# Altium PCB PCB.PcbDoc
Units mil, origin at the board's own origin, x right, y up, seen from the top; angles counter-clockwise.
Board outline 3750 x 2500 mil, 2 copper layers (Top Layer, Bottom Layer); 12 components, 0 nets, 243 pads, 2 vias.
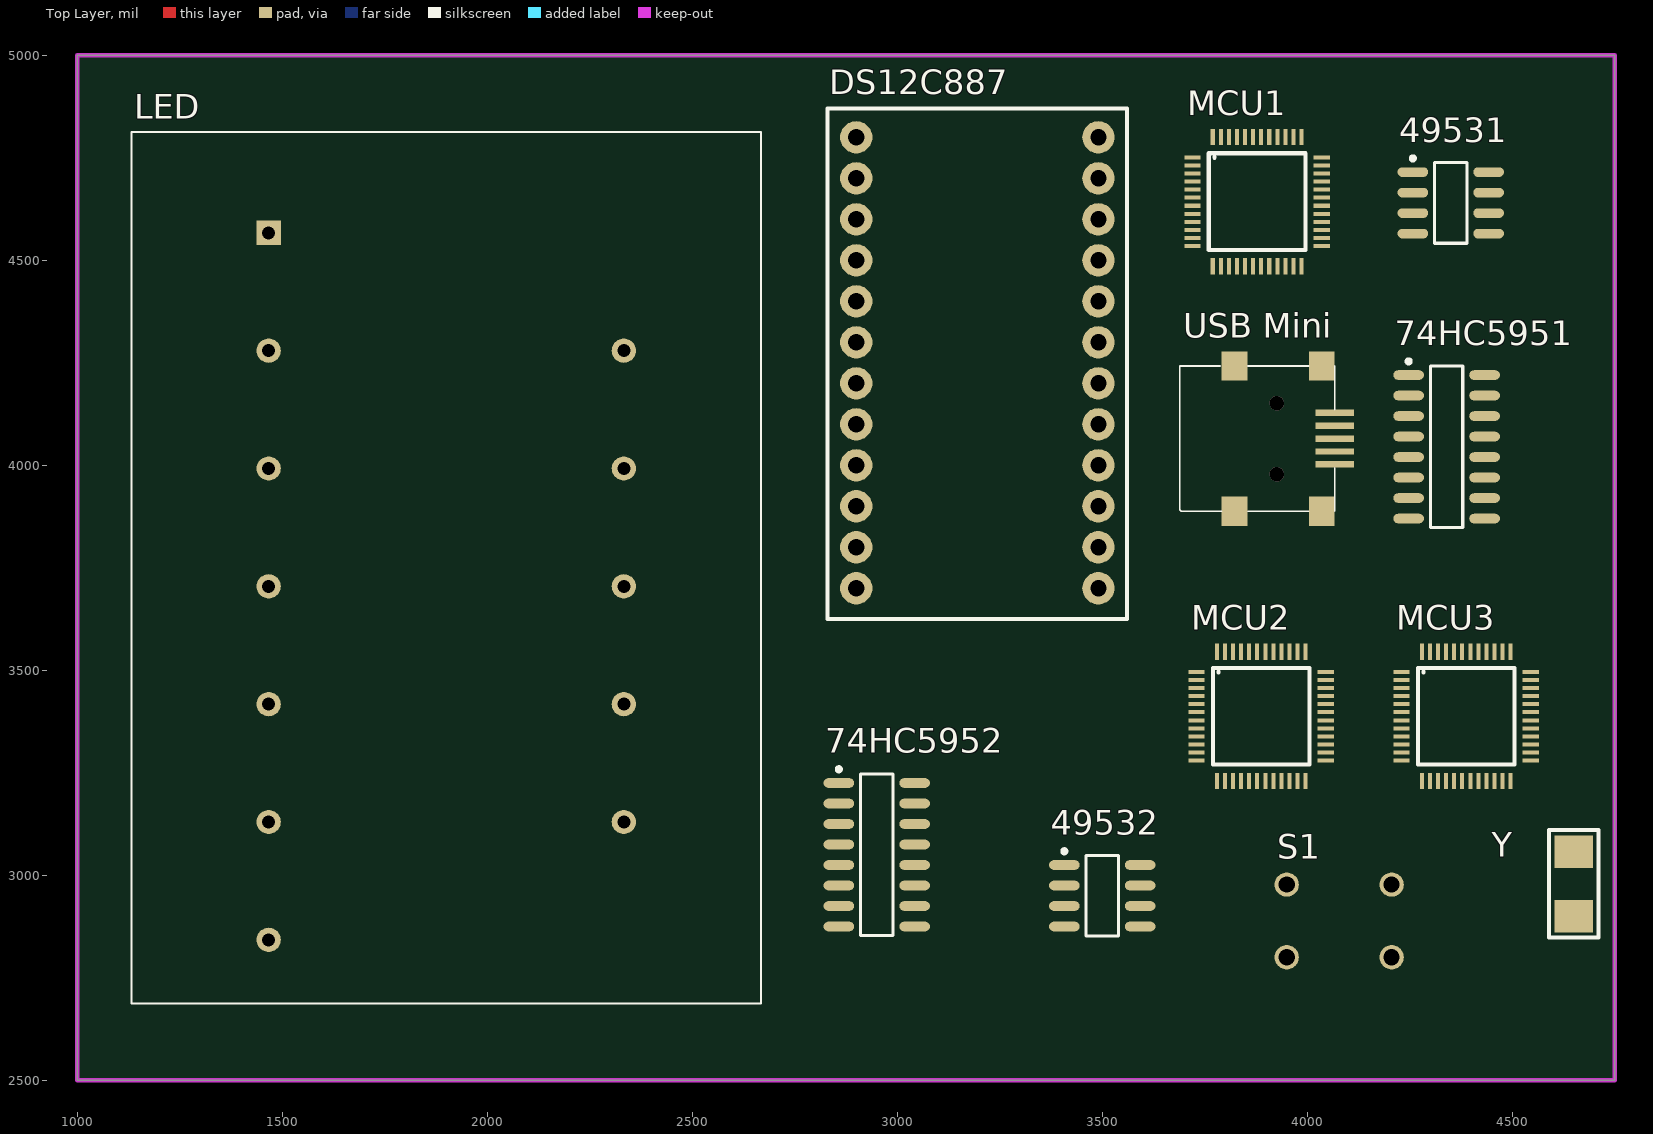
[diagram p0: Top Layer view]
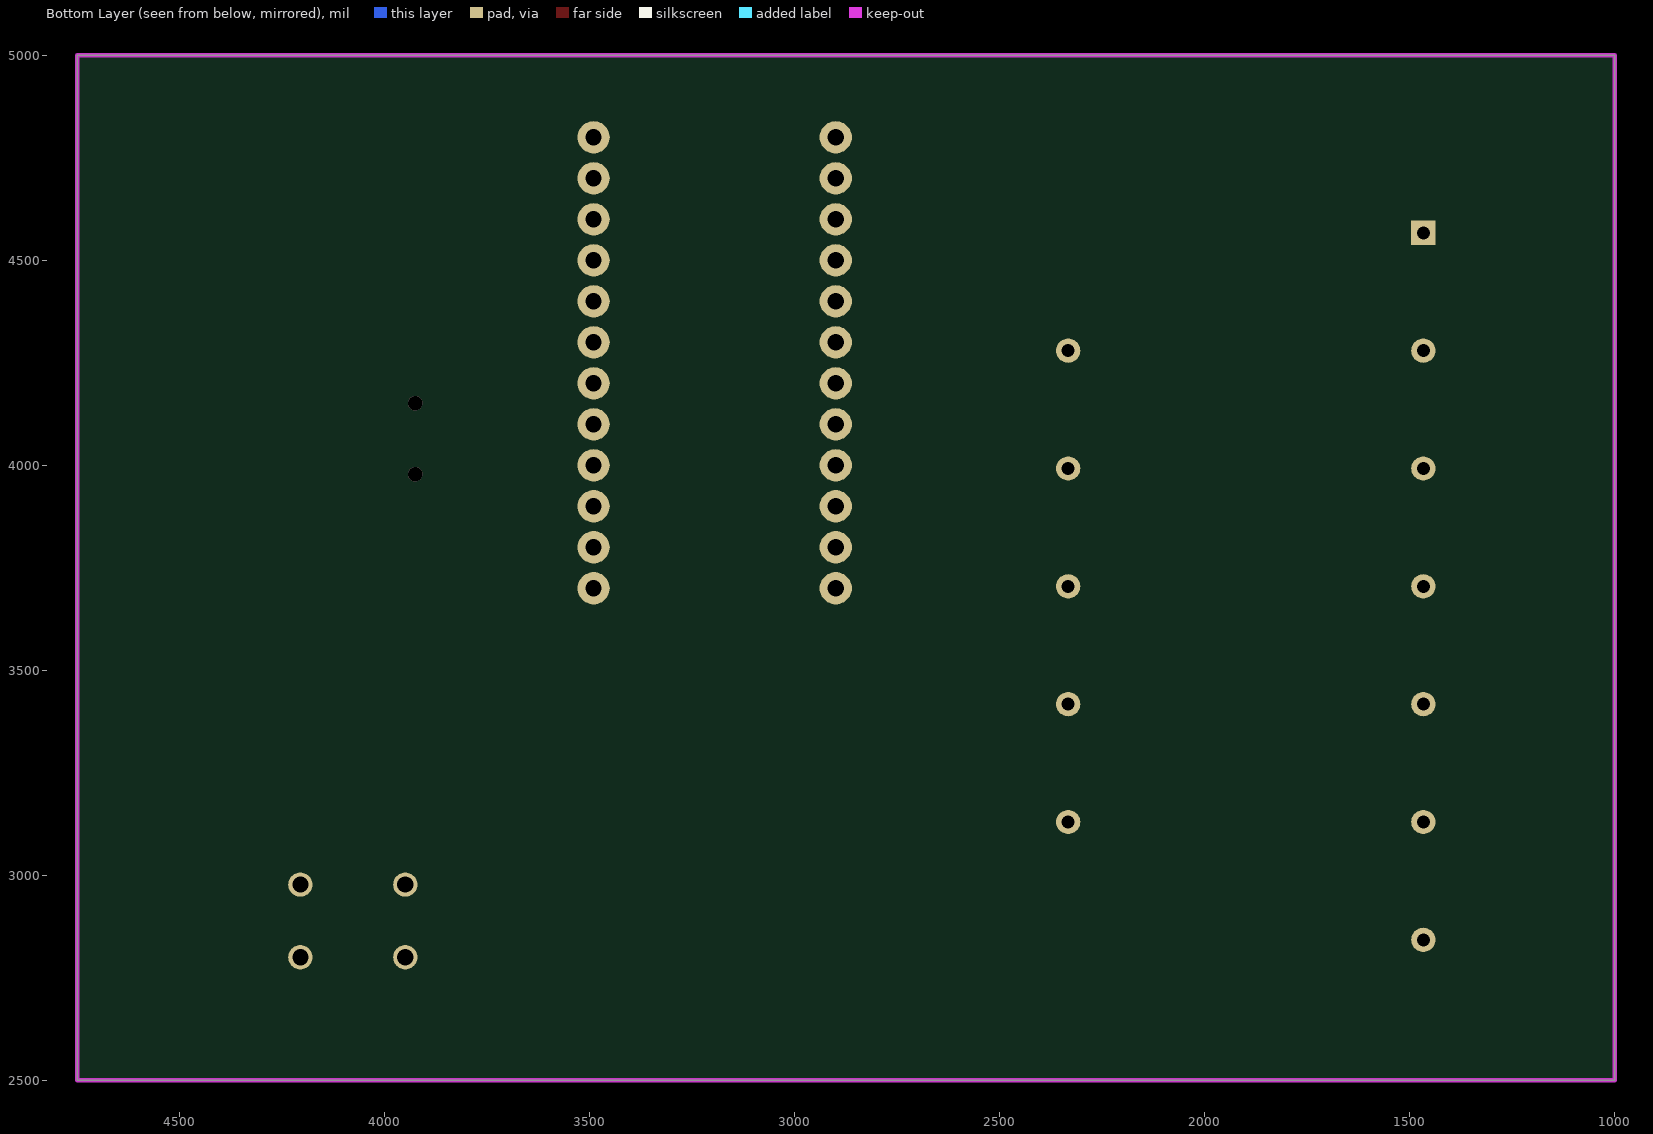
[diagram p1: Bottom Layer view, seen from below]

## Layer stack, top to bottom
Top Layer: signal copper 1.4
Dielectric: dielectric 12.6, FR-4, Dk 4.8
Bottom Layer: signal copper 1.4

## Board outline
1000,5000 1000,2500 4750,2500 4750,5000

## Design rules (kind name [scope] priority, off if disabled: settings)
Clearance [All] p1: gap=10
MinimumSolderMaskSliver [All] p1 off: minsoldermaskwidth=10
PolygonConnect [All] p1: connectstyle=Relief reliefconductorwidth=10 reliefentries=4 polygonreliefangle="90 Angle" airgapwidth=10
RoutingVias [All] p1: holewidth=28 width=50 viastyle="Through Hole" minholewidth=28 minwidth=50 maxholewidth=28 maxwidth=50
SilkscreenOverComponentPads [All] p1 off: minsilkscreentomaskgap=10
SolderMaskExpansion [All] p1: expansion=4
Width [All] p1: maxlimit=10 minlimit=10 preferedwidth=10
26 further rules are at their usual default settings.

## Components (designator, comment, footprint, x,y, rotation, side; value= is the part's Value field where it differs from the comment)
74HC5951 "74HC595" SO-16_L 4340,4045 r0 top
74HC5952 "74HC595" SO-16_L 2950,3050 r0 top
49531 "4953" SO8_L 4350,4640 r0 top
49532 "4953" SO8_L 3500,2950 r0 top
DS12C887 "DS12C887" TIMER 2900,4800 r0 top
LED "LED Matrix" "LED-MATRIX 5*7" 1900,3750 r0 top
MCU1 "STC12C5A60S2-35I-LQFP48" MCU 3740,4505 r0 top
MCU2 "STC12C5A60S2-35I-LQFP48" MCU 3750,3250 r0 top
MCU3 "STC12C5A60S2-35I-LQFP48" MCU 4250,3250 r0 top
S1 "SW-PB" BUTTON 3950,2800 r0 top
"USB Mini" "USB" USBFOOT 3945,4065 r0 top
Y "XTAL" 5023 4650,2900 r90 top

## Footprints (in the part's own frame and the unit in brackets; to place one, negate y for a bottom-side part, rotate by r counter-clockwise, add the part's x,y. Pads: shape width x height; smd on the part's side, far side on the other; paste and mask are expansions set on the pad)
5023 [mm]
  rect 2x2.4 smd: 1(0,0) 2(4,0)
  silkscreen extent -1.32,-1.52 5.33,1.52
BUTTON [mm]
  round 1.5 hole 1: 0(0,0) 1(6.5,0) 2(6.5,4.5) 3(0,4.5)
"LED-MATRIX 5*7" [mm] "LED"
  rect 1.5x1.5 hole 0.8: 1(-11,20.75)
  round 1.5 hole 0.8: 2(-11,13.45) 3(-11,6.15) 4(-11,-1.15) 5(-11,-8.45) 6(-11,-15.75) 7(-11,-23.05) 8(11,13.45) 9(11,6.15) 10(11,-1.15) 11(11,-8.45) 12(11,-15.75)
  silkscreen extent -19.5,-27 19.5,27, body extent -19.5,-27 19.5,27, height 10
MCU [mm]
  rect 1x0.25 smd: 1(-0.5,6.25) 2(-0.5,5.75) 3(-0.5,5.25) 4(-0.5,4.75) 5(-0.5,4.25) 6(-0.5,3.75) 7(-0.5,3.25) 8(-0.5,2.75) 9(-0.5,2.25) 10(-0.5,1.75) 11(-0.5,1.25) 12(-0.5,0.75) 25(7.5,0.75) 26(7.5,1.25) 27(7.5,1.75) 28(7.5,2.25) 29(7.5,2.75) 30(7.5,3.25) 31(7.5,3.75) 32(7.5,4.25) 33(7.5,4.75) 34(7.5,5.25) 35(7.5,5.75) 36(7.5,6.25)
  rect 0.25x1 smd: 13(0.75,-0.5) 14(1.25,-0.5) 15(1.75,-0.5) 16(2.25,-0.5) 17(2.75,-0.5) 18(3.25,-0.5) 19(3.75,-0.5) 20(4.25,-0.5) 21(4.75,-0.5) 22(5.25,-0.5) 23(5.75,-0.5) 24(6.25,-0.5) 37(6.25,7.5) 38(5.75,7.5) 39(5.25,7.5) 40(4.75,7.5) 41(4.25,7.5) 42(3.75,7.5) 43(3.25,7.5) 44(2.75,7.5) 45(2.25,7.5) 46(1.75,7.5) 47(1.25,7.5) 48(0.75,7.5)
  silkscreen extent 0.5,0.5 6.5,6.5
SO8_L [mm] "SOIC, 8-Leads, Body 4.9x3.9mm, Pitch 1.27mm, IPC High Density"
  oval 1.9x0.6 smd: 1(-2.35,1.905) 2(-2.35,0.635) 3(-2.35,-0.635) 4(-2.35,-1.905) 5(2.35,-1.905) 6(2.35,-0.635) 7(2.35,0.635) 8(2.35,1.905)
  silkscreen extent -2.47,-2.5 1,2.88, body extent -2,-2.5 2,2.5, height 1.75
SO-16_L [mm] "SOIC, 16-Leads, Body 9.9x3.9mm, Pitch 1.27mm, IPC High Density"
  oval 1.9x0.6 smd: 1(-2.35,4.445) 2(-2.35,3.175) 3(-2.35,1.905) 4(-2.35,0.635) 5(-2.35,-0.635) 6(-2.35,-1.905) 7(-2.35,-3.175) 8(-2.35,-4.445) 9(2.35,-4.445) 10(2.35,-3.175) 11(2.35,-1.905) 12(2.35,-0.635) 13(2.35,0.635) 14(2.35,1.905) 15(2.35,3.175) 16(2.35,4.445)
  silkscreen extent -2.47,-5 1,5.42, body extent -2,-5 2,5, height 1.75
TIMER [mm]
  round 2 hole 1: 1(0,0) 2(0,-2.54) 3(0,-5.08) 4(0,-7.62) 5(0,-10.16) 6(0,-12.7) 7(0,-15.24) 8(0,-17.78) 9(0,-20.32) 10(0,-22.86) 11(0,-25.4) 12(0,-27.94) 13(15,-27.94) 14(15,-25.4) 15(15,-22.86) 16(15,-20.32) 17(15,-17.78) 18(15,-15.24) 19(15,-12.7) 20(15,-10.16) 21(15,-7.62) 22(15,-5.08) 23(15,-2.54) 24(15,0)
  silkscreen extent -1.78,-29.84 16.76,1.78
USBFOOT [mm]
  rect 2.4x0.4 smd: 1(3.1,1.6) 2(3.1,0.8) 3(3.1,0) 4(3.1,-0.8) 5(3.1,-1.6)
  rect 1.6x1.8 smd: 6(2.3,-4.5) 7(2.3,4.5) 8(-3.1,4.5) 9(-3.1,-4.5)
  silkscreen extent -6.5,-4.5 3.1,4.5

## Part data
LED: library part "LED-Matrix 5*7"
S1: "Switch"
Y: "Crystal Oscillator"

## Via types
v1: diameter 35.43, hole 35.43, Top Layer to Bottom Layer, 2 vias

## Nets (pads, with @x,y where several pads share a name; then routed paths per layer and width w, separated by ;. In a path a pad name is that pad's centre, name@x,y a point inside that pad or via, vN(x,y) a via of type N, cw(c..) or ccw(c..) an arc to the next point about the centre after c; other vN are vias at no path point)
pads on no net: 74HC5951.1 74HC5951.2 74HC5951.3 74HC5951.4 74HC5951.5 74HC5951.6 74HC5951.7 74HC5951.8 74HC5951.9 74HC5951.10 74HC5951.11 74HC5951.12 74HC5951.13 74HC5951.14 74HC5951.15 74HC5951.16 74HC5952.1 74HC5952.2 74HC5952.3 74HC5952.4 74HC5952.5 74HC5952.6 74HC5952.7 74HC5952.8 74HC5952.9 74HC5952.10 74HC5952.11 74HC5952.12 74HC5952.13 74HC5952.14 74HC5952.15 74HC5952.16 49531.1 49531.2 49531.3 49531.4 49531.5 49531.6 49531.7 49531.8 49532.1 49532.2 49532.3 49532.4 49532.5 49532.6 49532.7 49532.8 "USB Mini.1" "USB Mini.2" "USB Mini.3" "USB Mini.4" "USB Mini.5" "USB Mini.6" "USB Mini.7" "USB Mini.8" "USB Mini.9" DS12C887.1 DS12C887.2 DS12C887.3 DS12C887.4 DS12C887.5 DS12C887.6 DS12C887.7 DS12C887.8 DS12C887.9 DS12C887.10 DS12C887.11 DS12C887.12 DS12C887.13 DS12C887.14 DS12C887.15 DS12C887.16 DS12C887.17 DS12C887.18 DS12C887.19 DS12C887.20 DS12C887.21 DS12C887.22 DS12C887.23 DS12C887.24 LED.1 LED.2 LED.3 LED.4 LED.5 LED.6 LED.7 LED.8 LED.9 LED.10 LED.11 LED.12 MCU1.1 MCU1.2 MCU1.3 MCU1.4 MCU1.5 MCU1.6 MCU1.7 MCU1.8 MCU1.9 MCU1.10 MCU1.11 MCU1.12 MCU1.13 MCU1.14 MCU1.15 MCU1.16 MCU1.17 MCU1.18 MCU1.19 MCU1.20 MCU1.21 MCU1.22 MCU1.23 MCU1.24 MCU1.25 MCU1.26 MCU1.27 MCU1.28 MCU1.29 MCU1.30 MCU1.31 MCU1.32 MCU1.33 MCU1.34 MCU1.35 MCU1.36 MCU1.37 MCU1.38 MCU1.39 MCU1.40 MCU1.41 MCU1.42 MCU1.43 MCU1.44 MCU1.45 MCU1.46 MCU1.47 MCU1.48 MCU2.1 MCU2.2 MCU2.3 MCU2.4 MCU2.5 MCU2.6 MCU2.7 MCU2.8 MCU2.9 MCU2.10 MCU2.11 MCU2.12 MCU2.13 MCU2.14 MCU2.15 MCU2.16 MCU2.17 MCU2.18 MCU2.19 MCU2.20 MCU2.21 MCU2.22 MCU2.23 MCU2.24 MCU2.25 MCU2.26 MCU2.27 MCU2.28 MCU2.29 MCU2.30 MCU2.31 MCU2.32 MCU2.33 MCU2.34 MCU2.35 MCU2.36 MCU2.37 MCU2.38 MCU2.39 MCU2.40 MCU2.41 MCU2.42 MCU2.43 MCU2.44 MCU2.45 MCU2.46 MCU2.47 MCU2.48 MCU3.1 MCU3.2 MCU3.3 MCU3.4 MCU3.5 MCU3.6 MCU3.7 MCU3.8 MCU3.9 MCU3.10 MCU3.11 MCU3.12 MCU3.13 MCU3.14 MCU3.15 MCU3.16 MCU3.17 MCU3.18 MCU3.19 MCU3.20 MCU3.21 MCU3.22 MCU3.23 MCU3.24 MCU3.25 MCU3.26 MCU3.27 MCU3.28 MCU3.29 MCU3.30 MCU3.31 MCU3.32 MCU3.33 MCU3.34 MCU3.35 MCU3.36 MCU3.37 MCU3.38 MCU3.39 MCU3.40 MCU3.41 MCU3.42 MCU3.43 MCU3.44 MCU3.45 MCU3.46 MCU3.47 MCU3.48 S1.0 S1.1 S1.2 S1.3 Y.1 Y.2
copper on no net:
  other v1: 3925.32,3978.39 3925.32,4151.61

## Keep-outs
Keep-Out Layer:
  the board outline again, w10